# EAGLE board untitled_V2 (EAGLE 6.6.0)
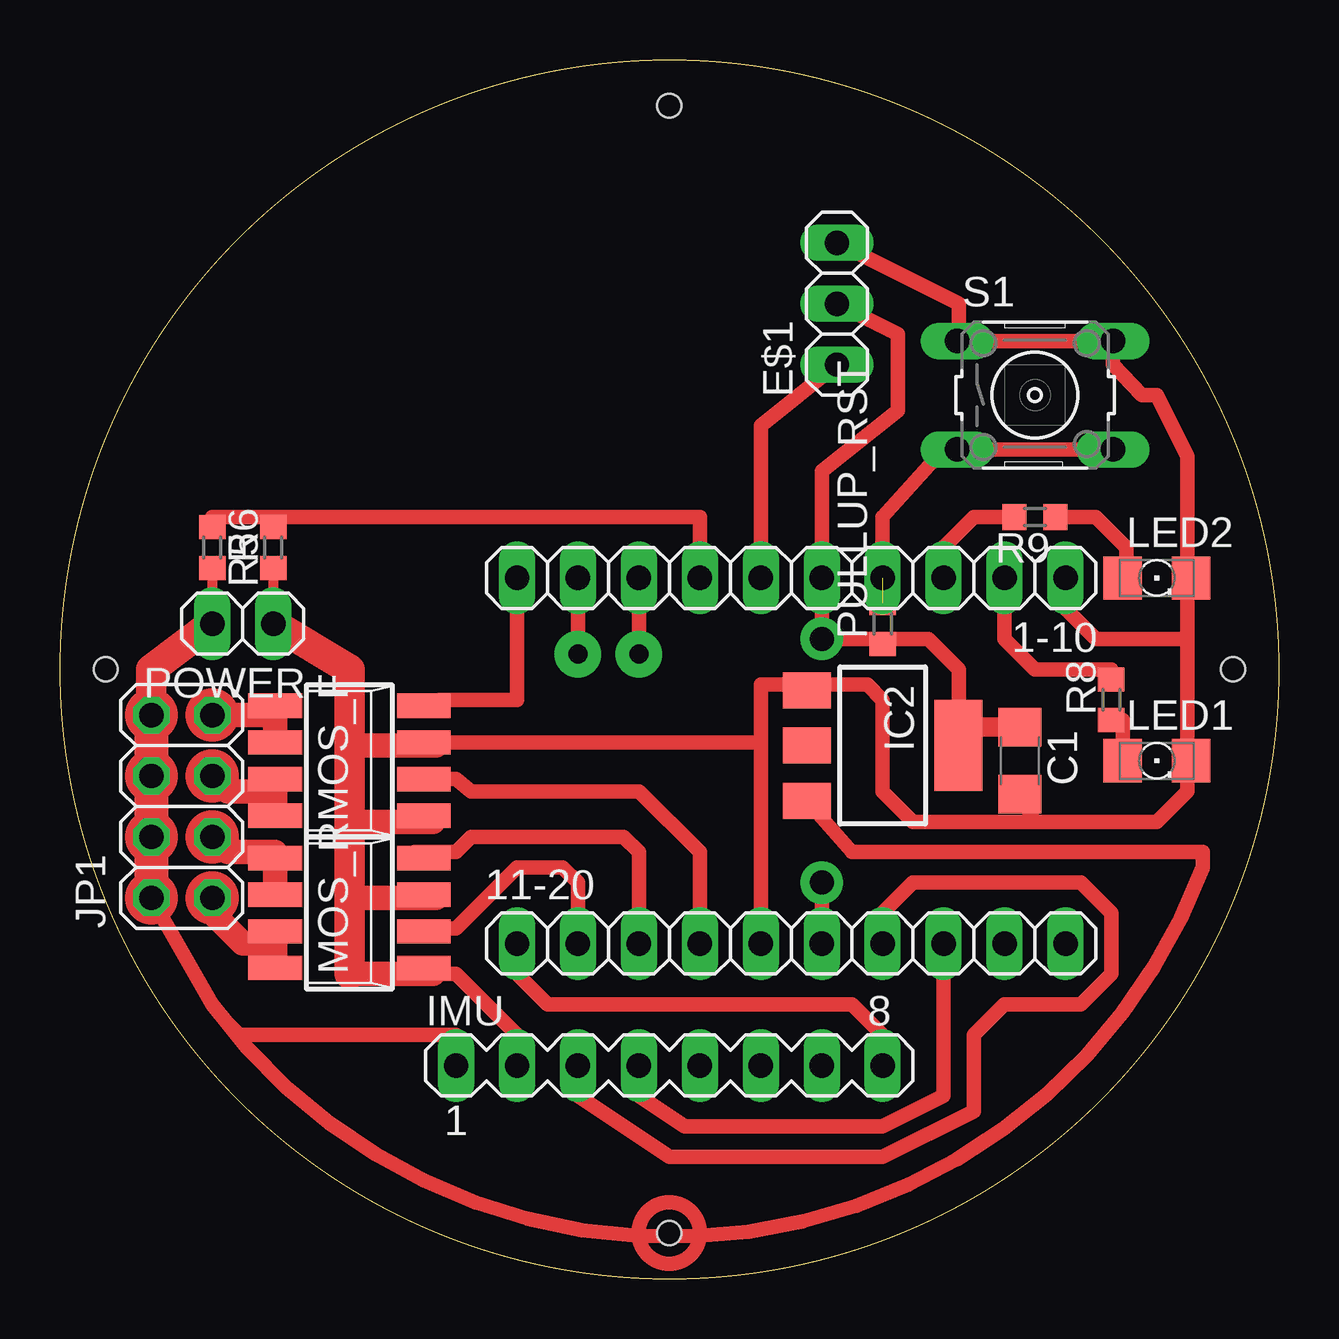
[diagram p0: board, top side]
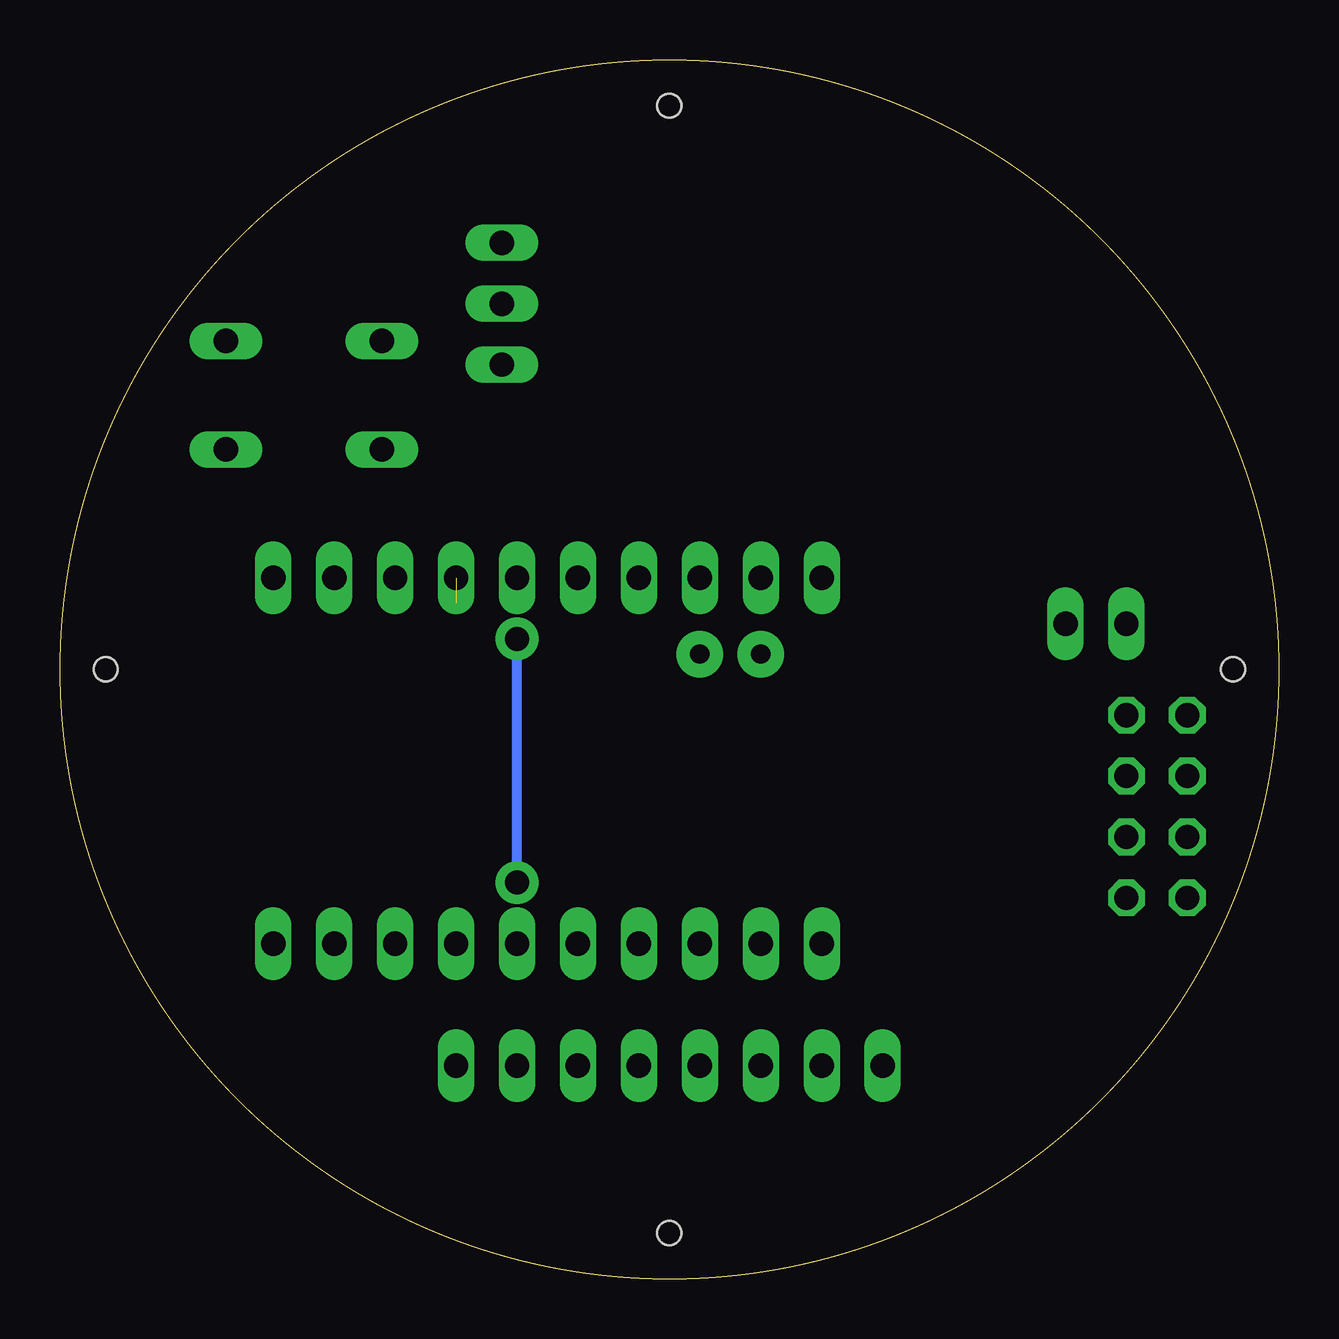
[diagram p1: board, bottom side, seen from below]

Size 50.8 x 50.8 mm. Coordinates in mm from the lower left corner, seen from the top.
Outline: circle at 25.4,25.4 radius 25.4
Copper layers (1*16): Top 0.035mm / dielectric 1.5mm / Bottom 0.035mm
Design rules "default": minimum track width 10mil, minimum drill 24mil, track to track 8mil, track to pad 8mil, pad to pad 8mil, via to via 8mil, smd to smd 8mil, copper to edge 40mil, drill to drill 8mil, minimum pad ring 10mil, minimum via ring 8mil, stop-mask expansion 4mil, vias tented up to drill 0mil, thermal gap 10mil
Holes 1 mm at 48.89,25.4 25.4,48.89 25.4,1.9 1.9,25.4

## Footprints (pad centres in the part's own frame; a part is rotated, then mirrored left to right if it is on the bottom)
1X10 = drill 1.016 long: 1 -11.43,0; 2 -8.89,0; 3 -6.35,0; 4 -3.81,0; 5 -1.27,0; 6 1.27,0; 7 3.81,0; 8 6.35,0; 9 8.89,0; 10 11.43,0
C1206 = smd 1.6 x 1.8: 1 -1.4,0; 2 1.4,0
1X03 = drill 1.016 long: 1 -2.54,0; 2 0,0; 3 2.54,0
SOT223 = smd 1.5 x 2: 1 -2.3,-3.15; 2 0,-3.15; 3 2.3,-3.15 | smd 3.8 x 2: 4 0,3.15
MA08-1 = drill 1.016 long: 1 -8.89,0; 2 -6.35,0; 3 -3.81,0; 4 -1.27,0; 5 1.27,0; 6 3.81,0; 7 6.35,0; 8 8.89,0
2X04 = drill 1.016 octagon: 1 -3.81,-1.27; 2 -3.81,1.27; 3 -1.27,-1.27; 4 -1.27,1.27; 5 1.27,-1.27; 6 1.27,1.27; 7 3.81,-1.27; 8 3.81,1.27
1206 = smd 1.6 x 1.803: A -1.422,0; C 1.422,0
SM8 = smd 1.016 x 2.235: 1 -2.286,-3.099; 2 -0.762,-3.099; 3 0.762,-3.099; 4 2.286,-3.099; 5 2.286,3.099; 6 0.762,3.099; 7 -0.762,3.099; 8 -2.286,3.099
1X02 = drill 1.016 long: 1 -1.27,0; 2 1.27,0
R0603 = smd 1 x 1.1: 1 -0.85,0; 2 0.85,0
B3F-10XX = drill 1.016 long: 1 -3.251,2.261; 2 3.251,2.261; 3 -3.251,-2.261; 4 3.251,-2.261

## Placement (x,y rotation side)
1-10  [1X10]  30.48,29.21 180 top
11-20  [1X10]  30.48,13.97 0 top
C1  [C1206]  40,21.59 270 top
E$1  [1X03]  32.38,40.64 90 top
IC2  LD117AS33TR  [SOT223]  34.29,22.22 270 top
IMU  [MA08-1]  25.4,8.89 0 top
JP1  [2X04]  5.08,19.68 90 top
LED1  [1206]  45.72,21.59 0 top
LED2  [1206]  45.72,29.21 0 top
MOS_F  [SM8]  12.06,21.59 90 top
MOS_R  [SM8]  12.06,15.24 90 top
POWER  [1X02]  7.62,27.3 180 top
PULLUP_RST  [R0603]  34.29,27.3 90 top
R5  [R0603]  6.35,30.48 270 top
R6  [R0603]  8.89,30.48 90 top
R8  [R0603]  43.81,24.13 90 top
R9  [R0603]  40.64,31.75 180 top
S1  [B3F-10XX]  40.64,36.83 0 top

## Library data of the parts
1-10 11-20 E$1 JP1 POWER = pinhead
C1 = resistor
IC2 = v-reg
IMU = con-lstb; OC_FARNELL: unknown; OC_NEWARK: unknown
LED1 LED2 = led
MOS_F MOS_R = zetex; OC_FARNELL: unknown; OC_NEWARK: unknown
PULLUP_RST R5 R6 R8 R9 = rcl
S1 = switch-omron; MPN: B3F-1000; OC_FARNELL: 176432; OC_NEWARK: 36M3542

## Nets
GND: 1-10.1 11-20.5 C1.2 IC2.1 IMU.2 LED1.C LED2.C MOS_F.1 MOS_F.3 MOS_R.1 MOS_R.3 POWER.1 R6.1 S1.1 S1.2
N$1: JP1.7 MOS_F.5 MOS_F.6
N$2: JP1.5 MOS_F.7 MOS_F.8
N$3: JP1.3 MOS_R.5 MOS_R.6
N$4: JP1.1 MOS_R.7 MOS_R.8
N$5: 1-10.5 11-20.6 C1.1 E$1.2 IC2.4 PULLUP_RST.1
N$6: MOS_F.4
N$7: MOS_F.2
N$8: MOS_R.4
N$9: MOS_R.2
N$10: 1-10.10
N$11: 11-20.2
N$12: 11-20.3
N$13: 11-20.4
N$15: 1-10.4 PULLUP_RST.2 S1.3 S1.4
N$16: 11-20.7 IMU.3
N$17: 11-20.8 IMU.4
N$18: LED1.A R8.1
N$21: 11-20.1 IMU.8
N$23: 1-10.2 R8.2
N$24: 1-10.3 R9.2
N$26: LED2.A R9.1
S$1: 1-10.7
S$2: R6.2
S$3: E$1.3
S$5: 1-10.6 E$1.1
S$6: 1-10.8
S$7: 1-10.9
VCC: IC2.3 IMU.1 JP1.2 JP1.4 JP1.6 JP1.8 POWER.2 R5.2

## Tracks (layer width: path | path; a pad name or v marks a point on that pad's centre or on a via)
GND
  Top 0.406: R6.1 POWER.1 | 46.99,29.21 LED2.C | 1-10.1 41.91,27.94 | 46.99,21.59 LED1.C | IC2.1 30.88,24.52 30.48,24.76 32.17,24.76 IC2.1
  Top 0.61: 15.54,12.7 16.51,12.7 19.05,10.16 IMU.2 | S1.1 S1.2 43.89,38.1 45.08,36.83 45.72,36.83 46.99,34.29 46.99,29.21 46.99,26.67 | 41.91,27.94 43.18,26.67 46.99,26.67 | 46.99,26.67 46.99,21.59 46.99,20.32 45.72,19.05 40.64,19.05 | 29.21,22.35 MOS_F.3 | 11-20.5 29.21,22.35 | 32.17,24.76 33.66,24.76 34.29,24.13 34.29,20.32 35.56,19.05 40.64,19.05 | 29.21,22.35 29.21,24.76 30.48,24.76 | C1.2 40.64,19.05
  Top 1.016: MOS_F.3 15.67,22.22 12.06,22.22 | MOS_F.1 15.54,19.05 12.06,19.05 | MOS_R.1 15.54,12.7 12.06,12.7 | MOS_R.3 15.67,15.87 12.06,15.87
  Top 1.27: POWER.1 12.06,25.4 12.06,22.22 12.06,19.05 12.06,15.87 12.06,12.7
N$1
  Top 1.016: JP1.7 8.97,23.49 MOS_F.5 MOS_F.6
N$2
  Top 1.016: JP1.5 6.98,20.32 8.97,20.32 MOS_F.7 MOS_F.8
N$3
  Top 1.016: JP1.3 6.98,17.78 8.97,17.78 MOS_R.5 MOS_R.6
N$4
  Top 1.016: JP1.1 6.35,15.24 7.62,13.97 8.97,13.97 | MOS_R.7 8.97,13.97 | 8.97,13.97 MOS_R.8
N$5  (via drill 1 pad 1.78)
  Top 0.406: 37.46,22.86 37.44,22.83 IC2.4 | 34.08,26.67 PULLUP_RST.1
  Top 0.61: 11-20.6 v31.75,16.51 | 37.46,22.86 37.46,22.99 37.46,25.4 36.2,26.67 34.08,26.67 v31.75,26.67 1-10.5 31.75,33.66 34.92,36.2 34.92,39.37 E$1.2
  Top 0.813: C1.1 37.46,22.99
  Bottom 0.406: v31.75,16.51 v31.75,26.67
N$6
  Top 0.406: MOS_F.4 15.8,24.13
  Top 0.61: 15.8,24.13 18.2,24.13
N$7
  Top 0.61: 26.67,16.09 26.67,17.78 24.13,20.32 17.14,20.32 16.51,20.83 MOS_F.2
N$8
  Top 0.406: 14.78,17.78 MOS_R.4
  Top 0.61: 24.13,16.09 24.13,17.78 23.49,18.41 17.14,18.41 16.51,17.78 14.78,17.78
N$9
  Top 0.406: 15.93,14.6 MOS_R.2
  Top 0.61: 20.1,17.14 19.05,17.14 16.51,14.6 15.93,14.6
N$10
  Top 0.61: 1-10.10 19.05,24.13 17.36,24.13
N$11
  Top 0.61: 11-20.2 21.59,16.51 20.95,17.14 19.9,17.14
N$12
  Top 0.61: 11-20.3 24.13,16.93
N$13
  Top 0.61: 11-20.4 26.67,16.93
N$15  (1 unrouted)
  Top 0.61: 1-10.4 34.29,31.75 36.83,34.57 S1.3 S1.4
N$16
  Top 0.406: IMU.3 21.59,7.62
  Top 0.61: 21.59,7.62 25.4,5.08 34.29,5.08 38.1,6.98 38.1,10.16 39.37,11.43 42.55,11.43 43.81,12.7 43.81,15.24 42.55,16.51 35.56,16.51 34.29,15.24 11-20.7
N$17
  Top 0.406: IMU.4 24.13,7.62
  Top 0.61: 24.13,7.62 26.04,6.35 34.29,6.35 36.83,7.62 11-20.8
N$18
  Top 0.61: R8.1 44.3,23.28 LED1.A
N$21
  Top 0.61: 11-20.1 19.05,12.7 20.32,11.43 33.02,11.43 34.29,10.16 IMU.8
N$23
  Top 0.61: 1-10.2 39.37,26.67 40.64,25.4 43.81,25.4 R8.2
N$24
  Top 0.61: 1-10.3 36.83,30.48 38.1,31.75 R9.2
N$26
  Top 0.406: 44.45,29.21 LED2.A
  Top 0.61: R9.1 43.18,31.75 44.45,30.48 44.45,29.21
S$1
  Top 0.61: 1-10.7 26.67,31.75 6.35,31.75 6.35,31.11
S$2
  Top 0.406: R6.2 8.89,31.11
S$3
  Top 0.61: E$1.3 37.46,40.64 37.46,39.37
S$4  (via drill 0.8 pad 1.93)
  other vias: 21.59,26.04
S$5
  Top 0.61: E$1.1 29.21,35.56 1-10.6
S$6  (via drill 0.8 pad 1.93)
  Top 0.61: 1-10.8 v24.13,26.04
S$7
  Top 0.61: 21.59,26.04 1-10.9
VCC
  Top 0.406: R5.2 POWER.2 | 7.62,10.16 6.35,11.43
  Top 0.61: IC2.3 33.02,17.78 47.62,17.78 47.62,17.14 arc-123 6.35,11.43 JP1.2 | IMU.1 16.51,10.16 7.62,10.16
  Top 1.27: POWER.2 3.81,25.4 JP1.8
  Top 1.422: JP1.8 JP1.6 JP1.4 JP1.2
(copper drawn outside any net)
  shapes: Top circle x9

## Text on the board
Document: mini drone / PPM_SUM